# Altium PCB Cubit3_main_pcb.PcbDoc (part 3 of 4)
Units mm, origin at the board's own origin, x right, y up, seen from the top; angles counter-clockwise.
Board outline 58.47 x 70 mm, 4 copper layers (Top Layer, Layer 2, Layer 3, Bottom Layer), stack 0.602 mm thick; 134 components, 100 nets, 451 pads, 313 vias.
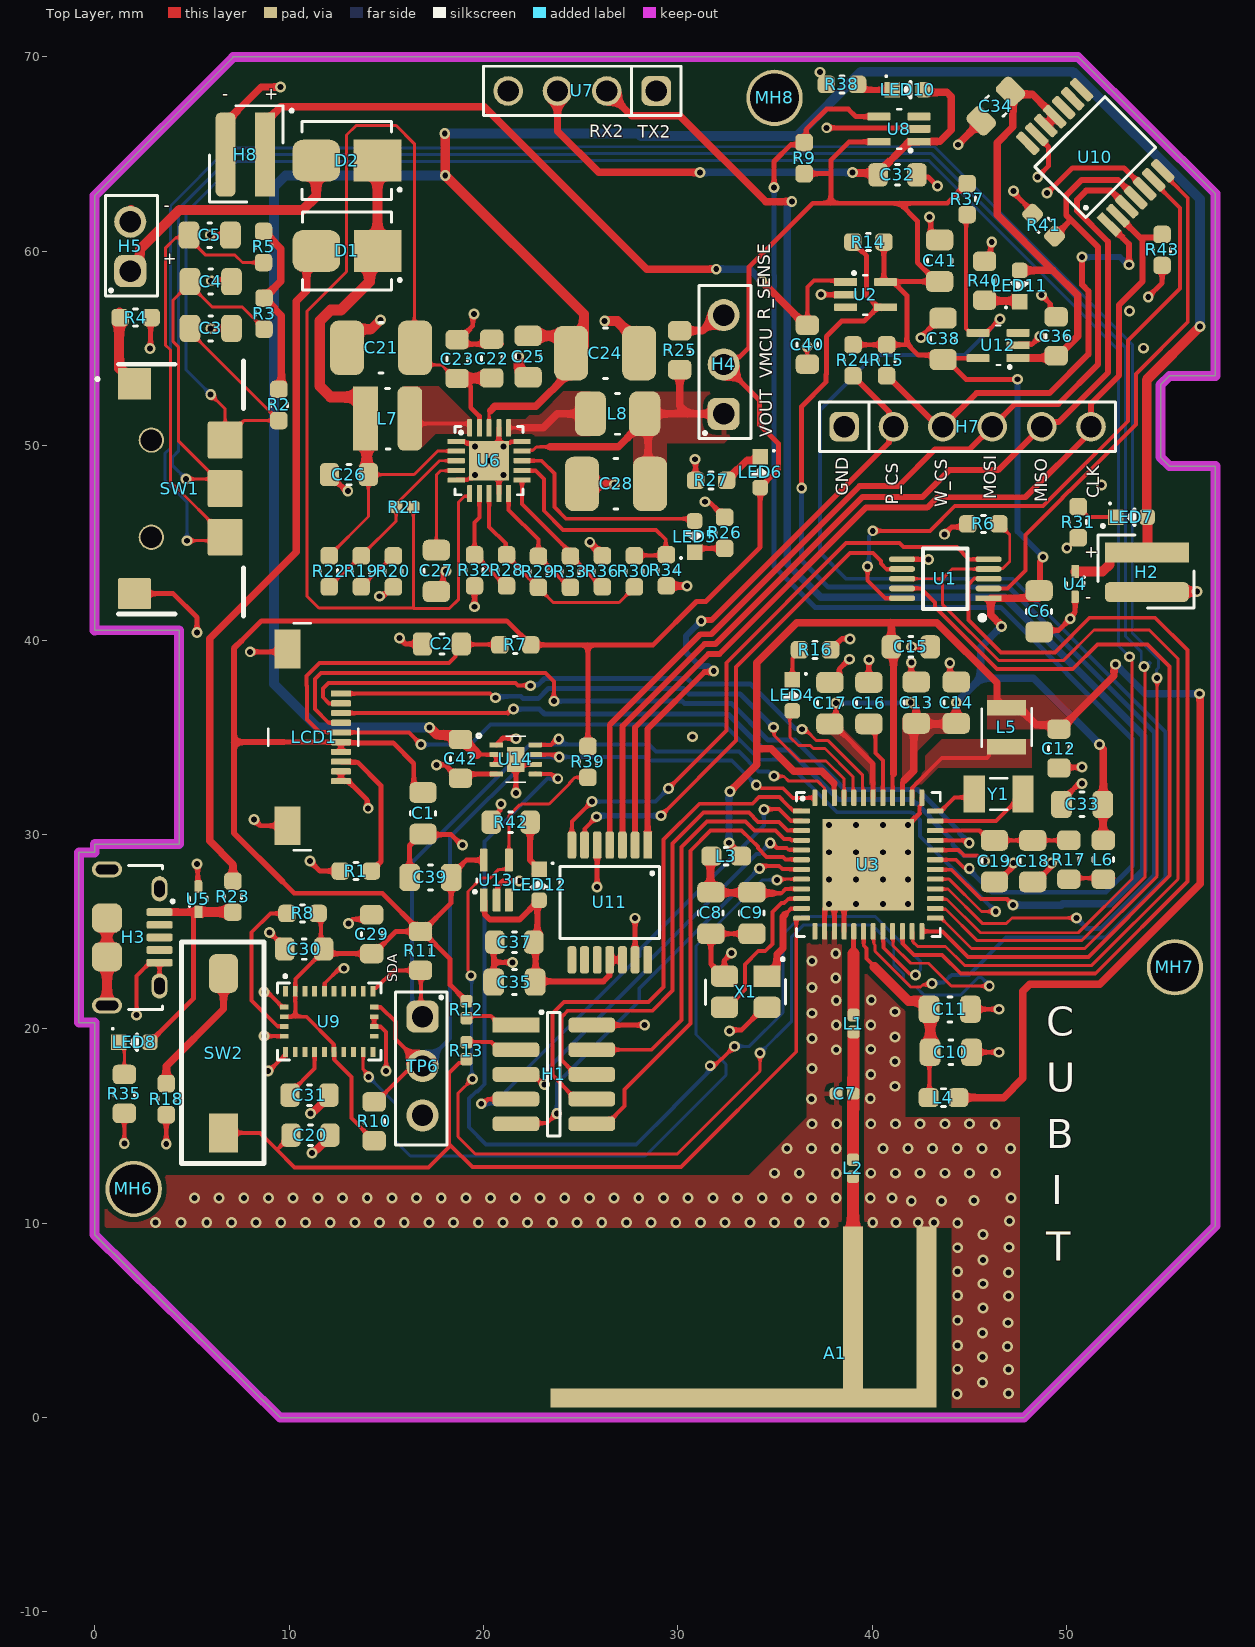
[diagram p0: Top Layer view]

## Part data (continued)
U6: library part BQ25570RGRT, "Switching Battery Charger Li-Ion/Li-Pol/Supercapacitor 110mA 2.2V to 5.5V 20-Pin VQFN EP T/R", Case/Package=VQFN, Manufacturer="Texas Instruments", Max Operating Temperature=125°C, Max Supply Voltage=5.1V, Min Operating Temperature=-40°C, Min Supply Voltage=100mV, Operating Supply Current=488nA, Output Current=100mA, Package Quantity=250, Switching Frequency=1MHz, Category="Battery Management", ComponentLink1Description=https://datasheet.ciiva.com/24110/slusbh2c-317150-24110945.pdf?src-supplier=Mouser, ComponentLink1URL=https://datasheet.ciiva.com/24110/slusbh2c-317150-24110945.pdf?src-supplier=Mouser, ComponentLink2Description=https://datasheet.ciiva.com/28483/1768287-28483478.pdf?src-supplier=Element14, ComponentLink2URL=https://datasheet.ciiva.com/28483/1768287-28483478.pdf?src-supplier=Element14, ComponentLink3Description=https://datasheet.ciiva.com/29590/bq25570-29590197.pdf?src-supplier=Digi-Key, ComponentLink3URL=https://datasheet.ciiva.com/29590/bq25570-29590197.pdf?src-supplier=Digi-Key, ComponentLink4Description=https://datasheet.ciiva.com/29590/bq25570-29590198.pdf?src-supplier=Digi-Key, ComponentLink4URL=https://datasheet.ciiva.com/29590/bq25570-29590198.pdf?src-supplier=Digi-Key, ComponentLink5Description=https://datasheet.ciiva.com/29892/bq25570-29892856.pdf?src-supplier=Avnet, ComponentLink5URL=https://datasheet.ciiva.com/29892/bq25570-29892856.pdf?src-supplier=Avnet, ComponentLink6Description=https://datasheet.ciiva.com/29892/bq25570-29892857.pdf?src-supplier=Avnet, ComponentLink6URL=https://datasheet.ciiva.com/29892/bq25570-29892857.pdf?src-supplier=Avnet, Contact Plating=Gold, Lead Free="Lead Free", Manufacturer Part Number=BQ25570RGRT, Mount="Surface Mount", Number of Pins=20, Packaging="Tape and Reel", Pricing 1="1=8.95000, 10=8.08600, 25=7.71000, 100=6.69440 (USD)", Radiation Hardening=No, REACH SVHC="No SVHC", RoHS=Yes, RoHS Compliant=Yes, Stock 1=22, Supplier 1=Digi-Key
U9: library part BNO055
U10 U11: Manufacturer=Osram, Category=Uncategorized, Manufacturer Part Number=AS5047D-ATSM, Pricing 1="1=9.40000, 5=8.25000, 10=7.42500, 25=6.60000, 50=6.10500, 100=5.28000 (USD)", RoHS=No, Stock 1=16475, Supplier 1=Digi-Key
U14: library part MAX17048G+T10, "Battery Battery Monitor IC Lithium-Ion 8-TDFN-EP (", Manufacturer=Maxim, Max Operating Temperature=85°C, Min Operating Temperature=-40°C, Operating Supply Current=23uA, Operating Supply Voltage=4.5V, Output Voltage=400mV, Package Quantity=10000, Category="Battery Management", ComponentLink1Description=https://datasheet.ciiva.com/14083/max17048-max17049-14083973.pdf?src-supplier=Digikey, ComponentLink1URL=https://datasheet.ciiva.com/14083/max17048-max17049-14083973.pdf?src-supplier=Digikey, Manufacturer Part Number=MAX17048G+T10, Mount="Surface Mount", Number of Pins=8, Packaging="Tape and Reel", Pricing 1="1=3.38, 10=3.034, 25=2.868, 100=2.4855, 250=2.35804, 500=2.11586, 1000=1.78445, 2500=1.69523, 5000=1.6315 (USD)", Radiation Hardening=No, RoHS=Yes, RoHS Compliant=Yes, Series=ModelGauge™, Stock 1=29108, Supplier 1=Digikey
X1: library part RH100-38.400-10-F-1010-TR, "Crystal 38.4000MHZ 10PF SMD", Manufacturer="Raltron Electronics", Manufacturer Part Number=RH100-38.400-10-F-1010-TR, Pricing 1="1=0.39000, 10=0.32400, 50=0.29180, 100=0.25940, 500=0.24640, 1000=0.20750 (USD)", RoHS=Yes, Stock 1=6000, Supplier 1=Digi-Key
Y1: "32.768kHz Â±20ppm Crystal 7pF 70 kOhms 2-SMD, No Lead", Package="SMD-2 ECS International", Availability=Unavailable, MF="ECS Inc.", MP=ECS-.327-7-34B-TR, Price=None, SnapEDA_Link=https://www.snapeda.com/parts/ECS-.327-7-34B-TR/ECS%20Inc./view-part/55054/?ref=snap

## Via types
v1: diameter 0.559, hole 0.305, Top Layer to Bottom Layer, tented both sides, 311 vias
v2: diameter 0.61, hole 0.305, Top Layer to Bottom Layer, tented both sides, 2 vias

## Nets (pads, with @x,y where several pads share a name; then routed paths per layer and width w, separated by ;. In a path a pad name is that pad's centre, name@x,y a point inside that pad or via, vN(x,y) a via of type N, cw(c..) or ccw(c..) an arc to the next point about the centre after c; other vN are vias at no path point)
2G4RF_IOP: L1.1 U3.17 | length 4.5
  Top Layer w0.254: 38.901,23.721 39.049,23.869 39.049,24.71 39.052,24.713 U3.17@39.052,25.013
  Top Layer w0.62: L1.1@39.043,20.709 39.043,23.863
+1V8_DCDC: C12.1 C15.1 L3.1 L4.1 L5.2 U3.40 U3.46 | length 83.6
  Top Layer w0.203: U3.46@38.037,31.897 38.037,32.634 ; U3.40@41.052,31.883 41.052,33.07 41.098,33.116
  Top Layer w0.381: v1(32.634,29.572) 32.668,29.538 32.668,29.463 33.247,28.884 L3.1@33.247,28.88 ; v1(32.69,32.213) 34.054,33.578 34.054,34.442 ; 38.037,32.634 37.413,33.259 35.956,33.259 34.805,34.41 34.086,34.41 34.054,34.442 ; 41.098,33.116 41.098,39.538 C15.1@40.986,39.649 40.986,40.853 40.945,40.894 ; L4.1@44.428,16.459 46.761,16.459 47.752,17.45 47.752,21.933 48.107,22.288 51.702,22.288 56.871,27.457 56.871,37.211 v1(56.845,37.236) ; L5.2@46.99,36.532 46.848,36.532 46.422,36.957 46.422,37.795 43.324,40.894 40.945,40.894 ; L5.2@46.99,36.71 47.365,36.71 48.435,35.64 49.383,35.64 C12.1@49.606,35.417 49.686,35.417 52.442,38.173 52.442,38.627 52.519,38.704 v1(52.519,38.752) ; 34.054,34.442 34.054,38.829 36.119,40.894 40.945,40.894
  Bottom Layer w0.381: v1(32.634,29.572) 32.634,32.05 32.656,32.072 32.656,32.179 v1(32.69,32.213) ; v1(52.519,38.752) 54.035,37.236 v1(56.845,37.236)
+3V2_VMCU: C1.1 C6.1 C13.1 C14.1 C17.1 C29.1 C30.1 C33.1 C38.1 C39.1 C41.1 H4.2 L6.1 LCD1.6 LCD1.7 LED6.A R7.2 R8.2 R9.2 R10.1 R11.1 R12.1 R14.2 R15.2 R24.2 R37.2 R39.2 U1.1 U2.5 U3.39 U3.42 U8.5 U9.3 U9.11 U9.28 U12.5 U13.5 | length 210.1
  Top Layer w0.203: U9.3@9.753,20.621 10.323,20.621 ; R8.2@11.493,25.933 11.636,25.791 C30.1@11.636,24.247 ; C30.1@11.779,24.105 11.779,24.005 10.329,22.555 10.329,21.948 U9.28@10.315,21.933 10.315,21.399 10.323,21.391 10.323,20.621 ; R10.1@14.376,14.24 14.357,14.24 13.97,14.627 13.97,14.647 13.208,15.408 13.208,17.525 12.334,18.399 12.334,18.789 U9.11@12.315,18.808 12.296,18.828 12.296,19.218 10.893,20.621 10.323,20.621
  Top Layer w0.254: 7.552,39.962 8.58,40.991 21.196,40.991 22.435,39.751 25.375,39.751 ; 9.652,27.584 10.262,26.975 14.796,26.975 R11.1@16.764,25.007 ; 9.728,34.746 LCD1.6@12.671,34.746 ; C30.1@12.017,23.867 C29.1@14.249,23.867 14.349,23.867 15.49,25.007 R11.1@16.764,25.007 ; LCD1.7@12.671,34.246 LCD1.6@12.671,34.712 ; LCD1.6@12.704,34.723 12.681,34.723 LCD1.6@12.671,34.713 ; C1.1@16.891,32.156 16.786,32.156 16.414,32.529 16.414,33.649 15.351,34.712 LCD1.6@12.671,34.712 ; R12.1@19.126,21.42 19.126,21.439 18.969,21.596 18.95,21.596 18.288,22.259 18.288,23.583 R11.1@16.864,25.007 ; U13.5@20.015,28.677 19.123,28.677 18.339,27.892 C39.1@18.339,27.788 18.339,26.482 R11.1@16.864,25.007 ; R39.2@25.375,34.531 25.375,39.751 ; R9.2@36.5,63.995 37.859,63.995 37.871,63.983 ; C17.1@37.821,35.687 37.987,35.687 40.023,33.651 40.023,32.69 40.052,32.661 U3.42@40.052,31.883 ; C17.1@37.884,35.751 38.133,36 38.133,36.747 v1(38.14,36.754) ; R24.2@39.014,55.194 R15.2@40.742,55.194 41.723,55.194 41.781,55.252 ; U8.5@40.352,65.639 40.342,65.629 38.814,65.629 37.871,64.687 37.871,63.983 ; R14.2@40.602,60.477 40.602,58.493 40.675,58.42 U2.5@40.691,58.42 ; U2.5@40.691,58.445 43.302,58.445 C41.1@43.304,58.447 ; U2.5@41.086,58.42 41.781,57.725 41.781,55.252 ; U3.39@41.552,31.883 41.552,32.68 41.657,32.785 ; C41.1@43.47,58.447 C41.1@43.304,58.447 ; C38.1@43.648,54.431 43.423,54.656 42.377,54.656 41.781,55.252 ; C38.1@43.715,54.498 43.866,54.498 45.442,54.498 U12.5@45.451,54.507 ; C38.1@43.866,54.431 43.866,54.379 44.829,53.416 v1(47.473,53.416) ; R37.2@44.882,63.487 43.868,62.473 41.413,62.473 ; R11.1@16.764,25.007 R11.1@16.864,25.007 ; 25.375,39.751 28.727,39.751 30.963,41.986 31.445,41.986 34.238,44.779 LED6.A@34.238,47.842 35.178,48.782 35.178,50.102 34.213,51.068 34.213,52.325 H4.2@32.359,54.179 32.702,54.179 33.093,54.57 33.181,54.57 33.655,55.043 33.655,59.182 36.946,62.473 37.871,62.473 ; 37.871,62.473 41.413,62.473 ; 37.871,62.473 37.871,63.983 ; 41.413,62.473 42.326,61.56 42.326,59.425 C41.1@43.304,58.447
  Top Layer w0.305: 7.552,39.962 7.163,39.573 7.163,34.746 ; 9.652,27.584 7.163,30.074 7.163,34.746 ; 9.728,34.746 7.163,34.746 ; C6.1@48.59,42.545 48.64,42.595 48.64,44.05 48.793,44.203 v1(48.793,44.272)
  Top Layer w0.381: 41.657,32.785 42.14,33.269 42.14,35.587 C13.1@42.266,35.712 42.266,36.49 41.982,36.773 v1(41.982,36.779) ; C13.1@42.393,35.687 C14.1@44.323,35.687 ; C14.1@44.323,35.712 v1(44.323,36.779) ; U1.1@46.098,42.101 46.098,41.306 46.653,40.751 v1(46.653,40.703) ; U1.1@46.098,42.152 C6.1@48.574,42.152 ; v1(51.701,34.632) 51.701,34.584 51.892,34.393 C33.1@51.892,31.572 ; C33.1@51.867,31.547 51.88,31.534 51.88,29.715 L6.1@51.892,29.702
  Bottom Layer w0.254: v1(38.14,36.754) 38.152,36.767 41.97,36.767 v1(41.982,36.779)
  Bottom Layer w0.305: v1(47.473,53.416) 47.473,45.593 v1(48.793,44.272)
  Bottom Layer w0.381: v1(44.323,36.779) 45.58,38.036 ; v1(46.653,40.703) 45.58,39.631 45.58,38.036 ; v1(51.701,34.632) 48.297,38.036 45.58,38.036
+3V2_VMCU_S: R2.2 R3.2 R5.2 | length 9.3
  Top Layer w0.381: R5.2@8.687,61.023 9.581,60.129 9.581,58.464 R3.2@8.712,57.594 9.607,56.7 9.607,53.028 R2.2@9.474,52.895